# Altium PCB planespotter.PcbDoc
Units mil, origin at the board's own origin, x right, y up, seen from the top; angles counter-clockwise.
Board outline 3149.61 x 2185.04 mil, 4 copper layers (Top Layer, Ground Plane, Power Plane, Bottom Layer), stack 62.192 mil thick; 74 components, 61 nets, 274 pads, 164 vias.
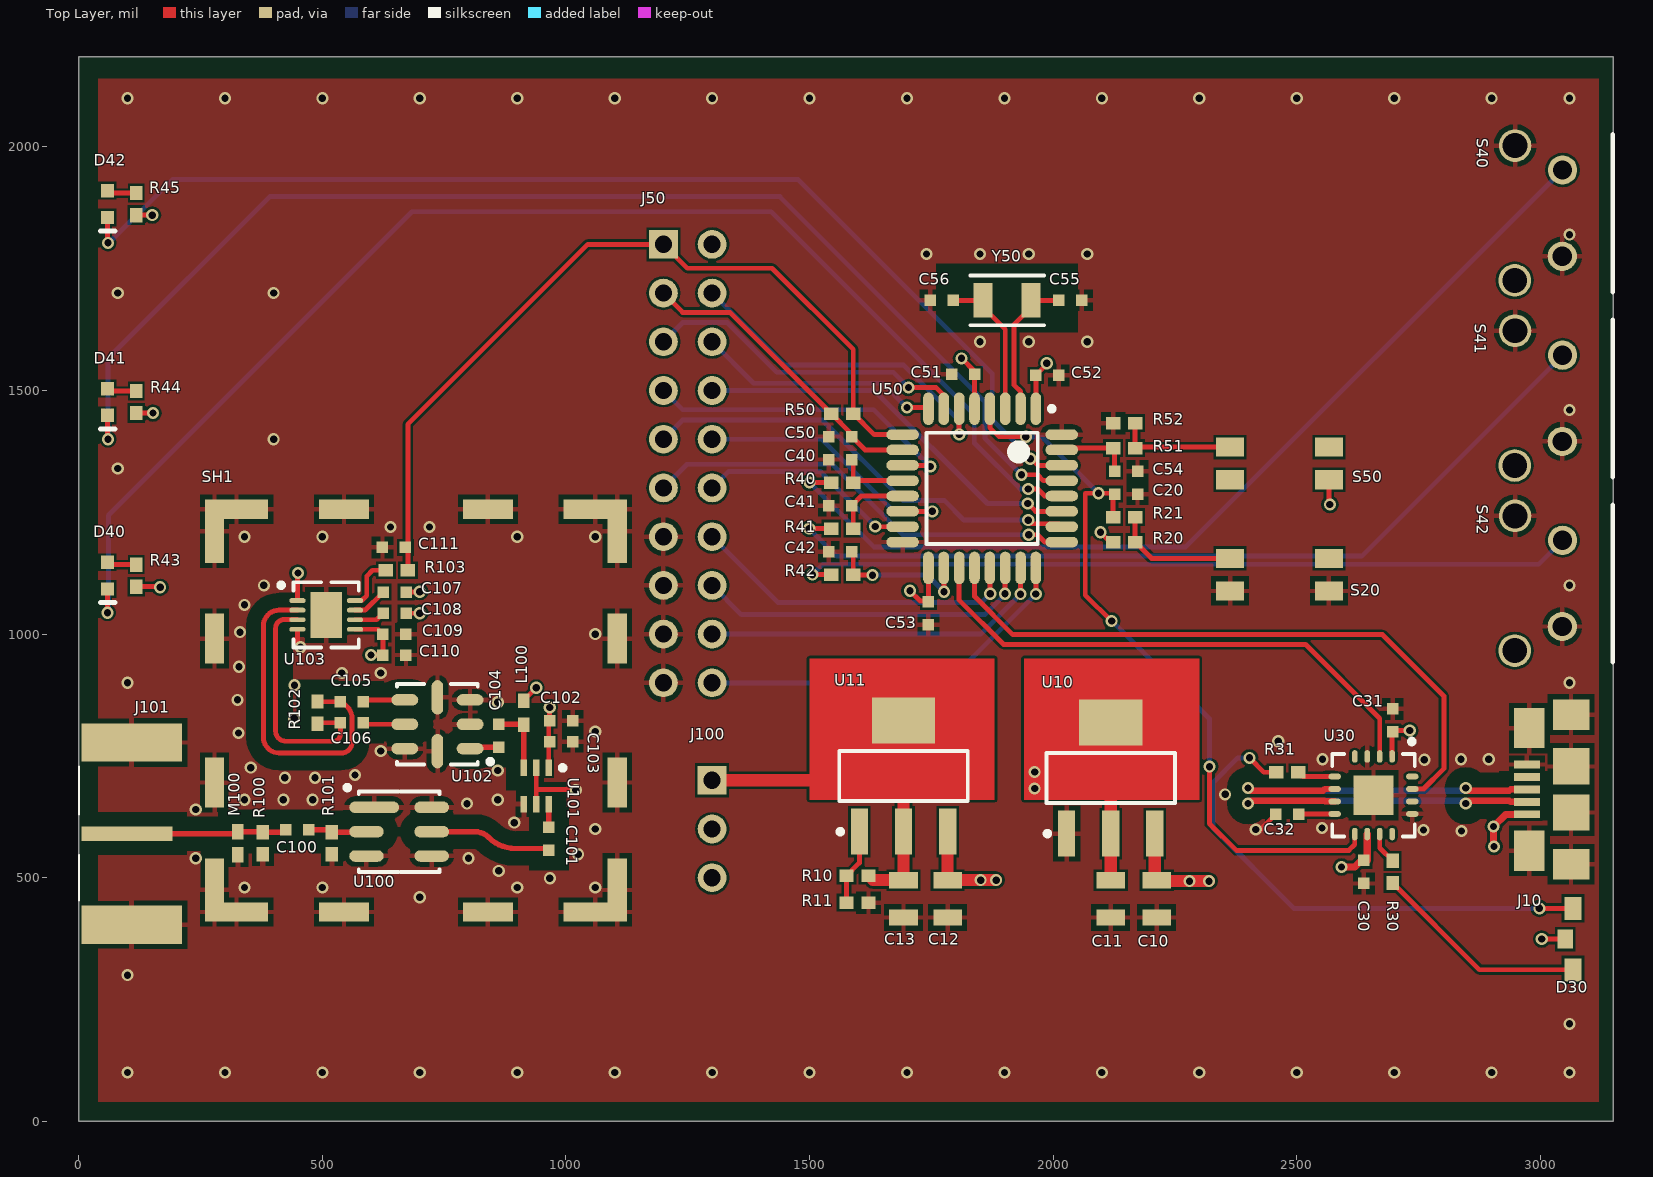
[diagram p0: Top Layer view]
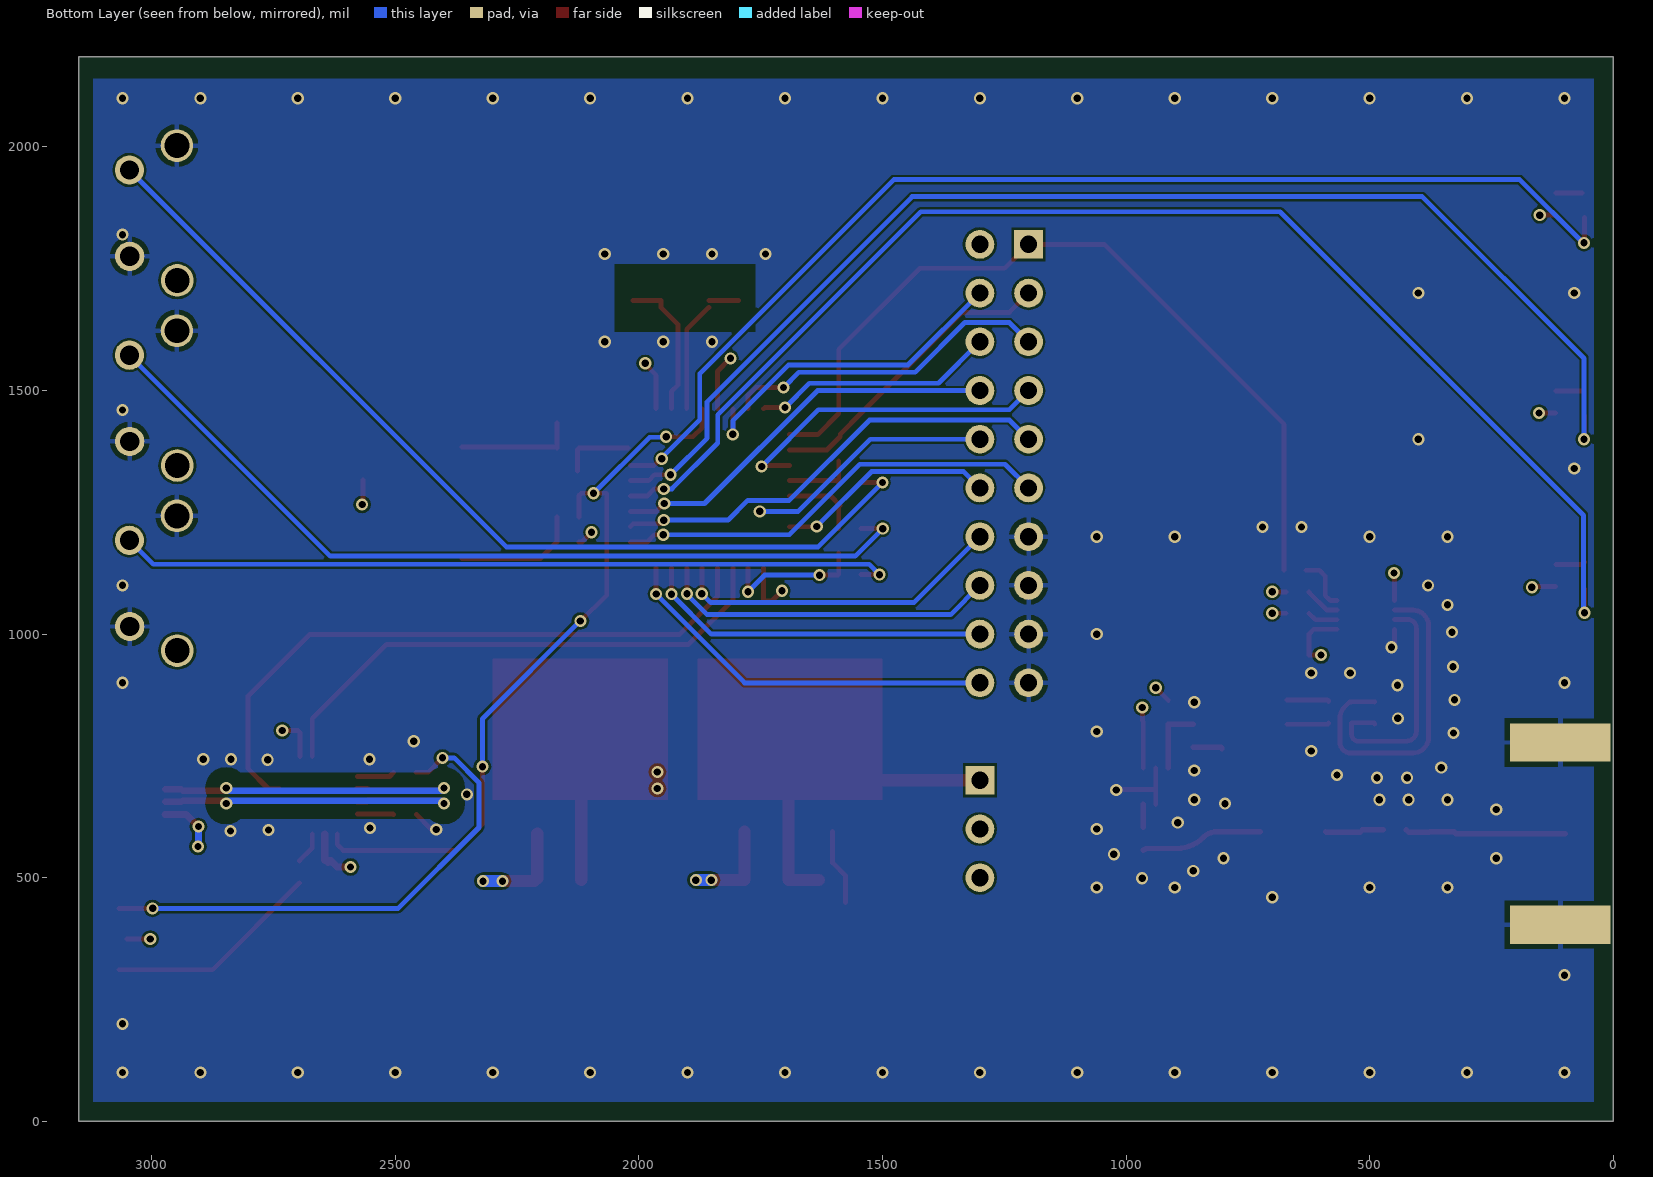
[diagram p1: Bottom Layer view, seen from below]
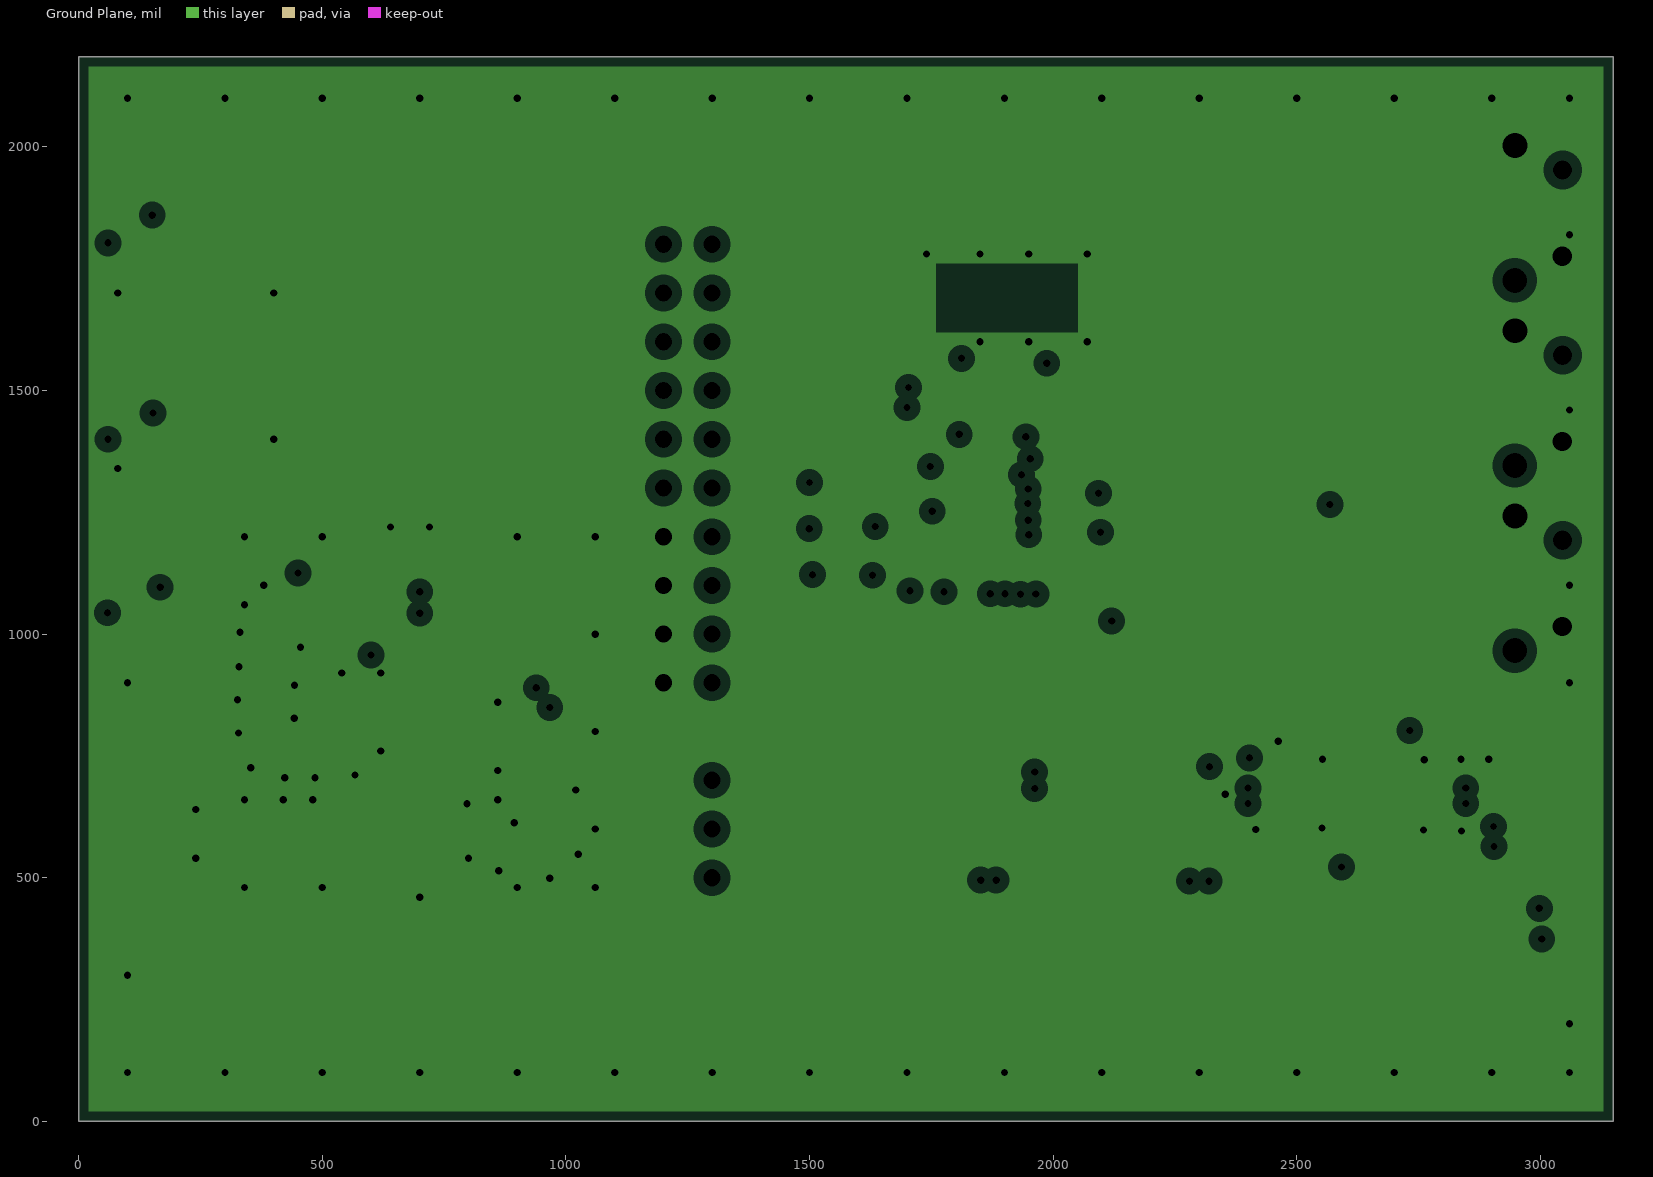
[diagram p2: Ground Plane, clearances drawn from the general rule]
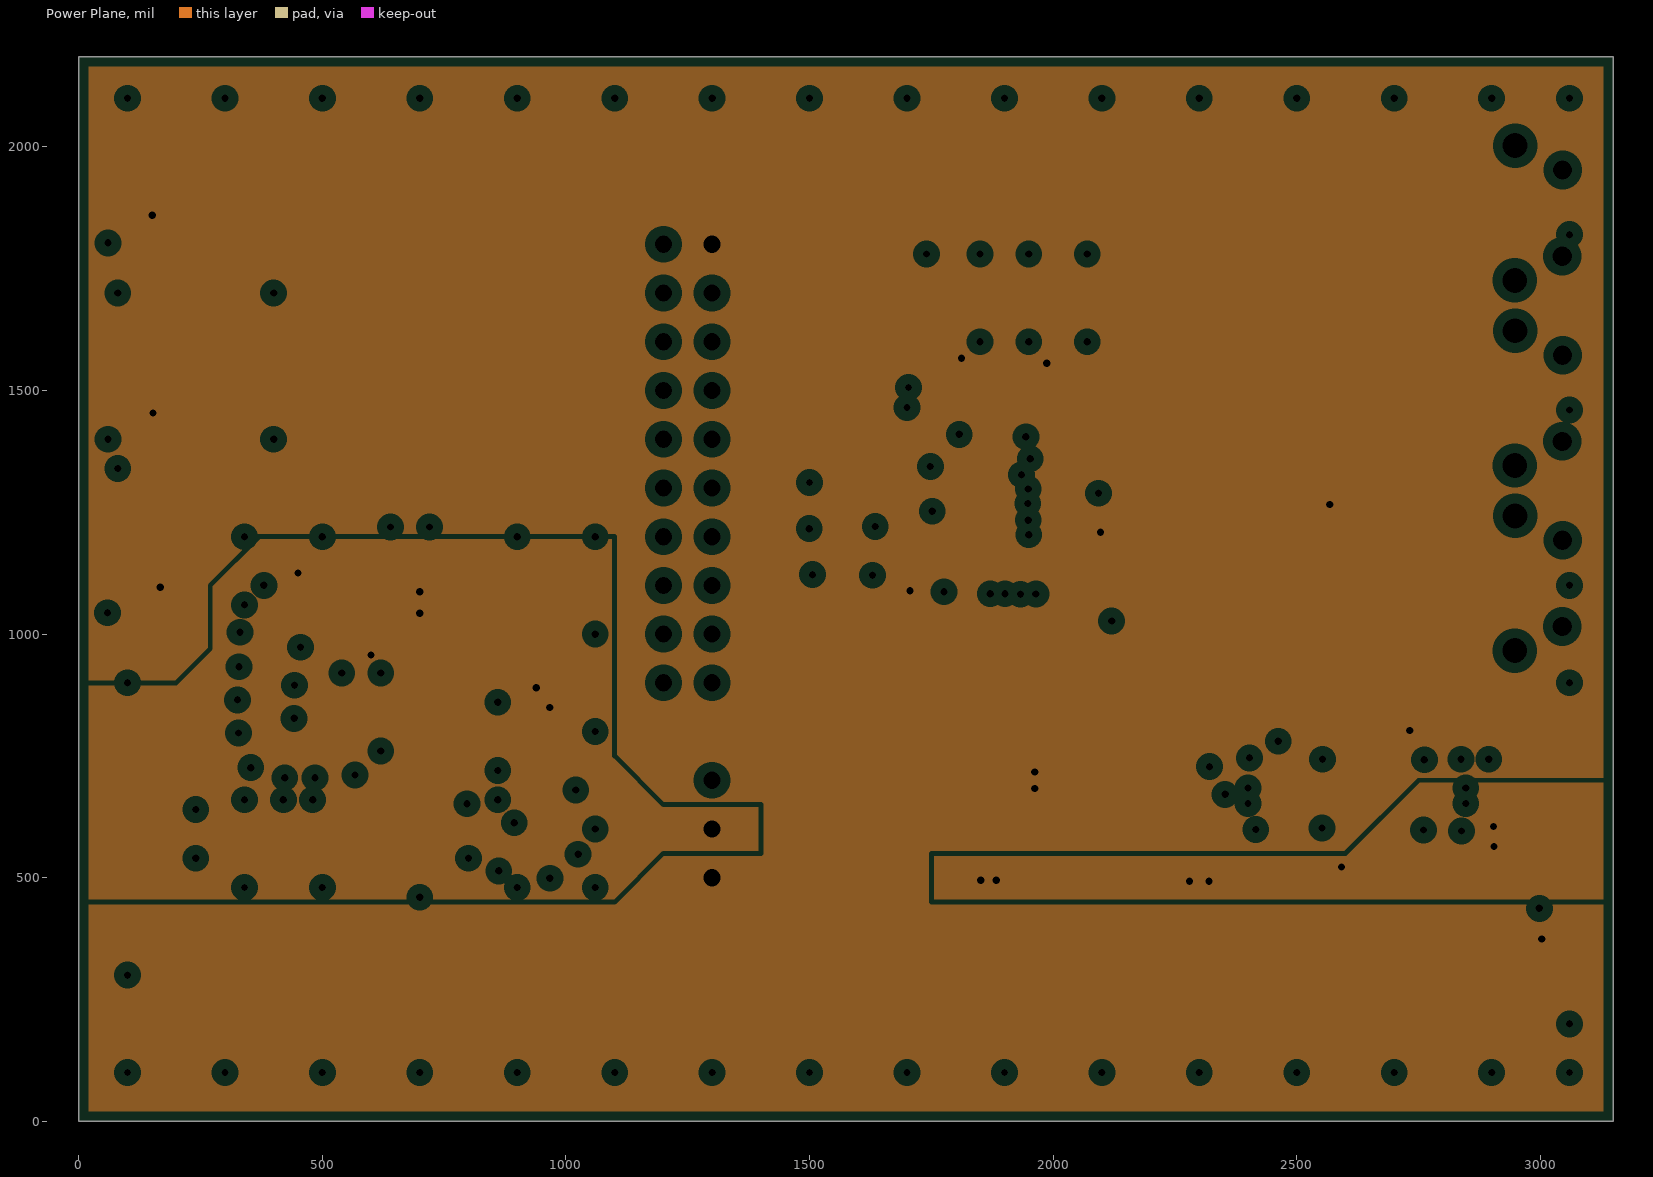
[diagram p3: Power Plane, clearances drawn from the general rule]
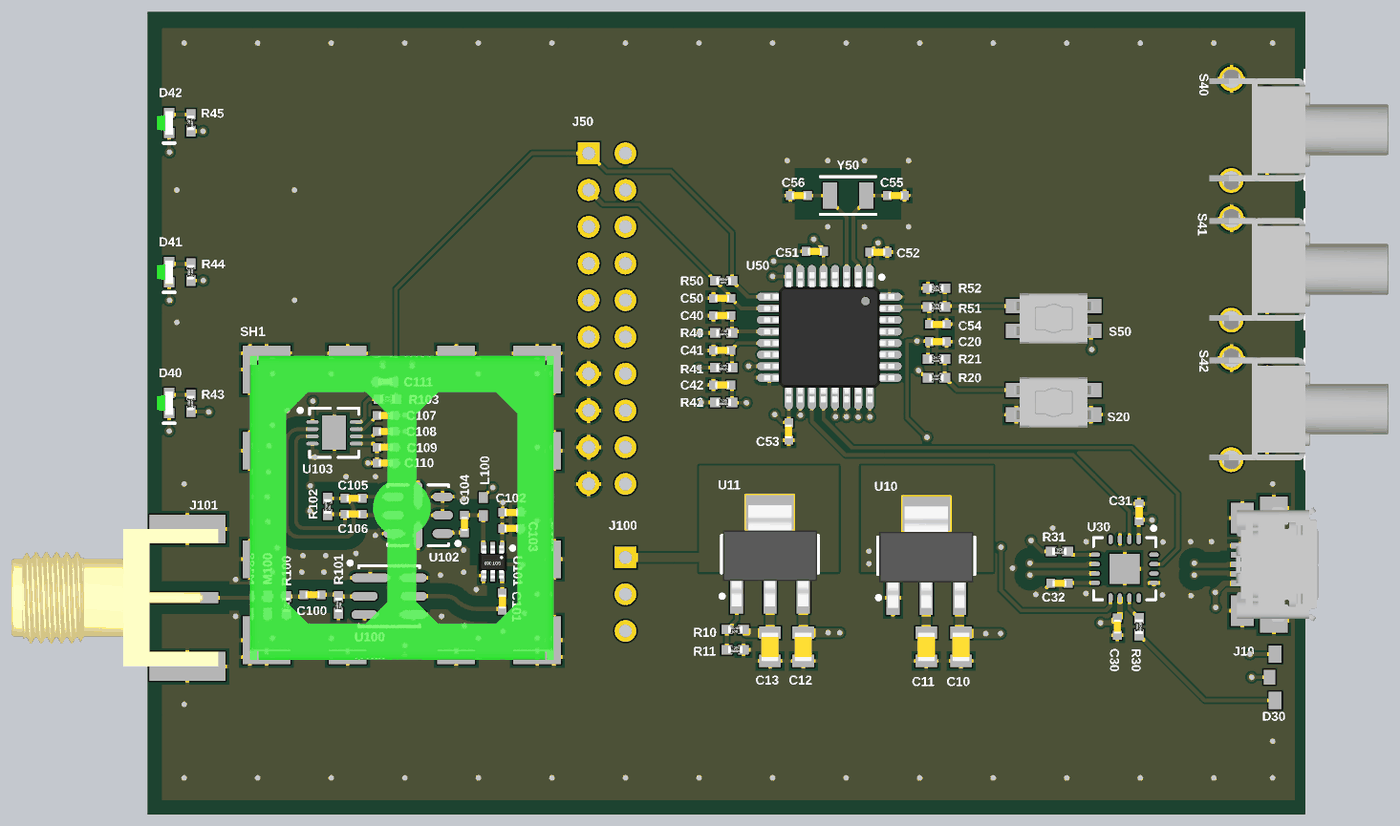
[diagram p4: 3D render of the assembled board from above, using the file's embedded part models]

## Layer stack, top to bottom
Top Solder: solder mask 0.4, Solder Resist, Dk 3.5
Top Layer: signal copper 1.4
Dielectric 1: core 7.874, FR-4, Dk 4.2
Ground Plane: plane copper 1.4, net GND
Dielectric 3: core 40.8441, FR-4, Dk 4.2
Power Plane: plane copper 1.4, net 3V3
Dielectric 4: prepreg 7.874, FR-4, Dk 4.2
Bottom Layer: signal copper 1.4
Bottom Solder: solder mask 0.4, Solder Resist, Dk 3.5

## Board outline
0,0 3149.61,0 3149.61,2185.04 0,2185.04

## Design rules (kind name [scope] priority, off if disabled: settings)
Clearance "50 Ohm Clearance" [InNetClass('50_OHM') vs InNamedPolygon('TopGndPour')] p1: gap=30
Clearance "NPTH Clearance" [All vs IsThruPin and (not PadIsPlated)] p2: gap=10
Clearance "Diff Pair Ground Pour Clearance" [InNamedPolygon('TopGndPour') OR InNamedPolygon('BtmGndPour') vs (InDifferentialPairClass('All Differential Pairs'))] p3: gap=30
Clearance "USB Hub Clearance" [InComponent('U100') OR InComponent('U200') vs InComponent('U100') OR InComponent('U200')] p4: gap=3
Clearance [All] p5: gap=5
ComponentClearance headerClearance [HasFootprint('HDR254P1X6-N-RA-F') vs HasFootprint('HDR254P1X6-N-RA-F')] p1: gap=0 collisioncheckmode=3 verticalgap=0 showdistances=FALSE
ComponentClearance [All] p2: gap=10 collisioncheckmode=3 verticalgap=10 showdistances=FALSE
DiffPairsRouting [All] p1: maxlimit=7 minlimit=7 mostfreqgap=7 toplayer_minwidth=7 toplayer_maxwidth=15 toplayer_prefwidth=15 bottomlayer_minwidth=7 bottomlayer_maxwidth=15 bottomlayer_prefwidth=15 maxuncoupledlength=500
HoleSize [All] p1: absolutevalues=TRUE maxlimit=250 minlimit=1 maxpercent=80.000 minpercent=20.000
MinimumSolderMaskSliver DCDCSolderMaskSliver [InComponent('U200') vs InComponent('U200')] p1: minsoldermaskwidth=1
MinimumSolderMaskSliver "Min Solder Mask Sliver" [All] p2: minsoldermaskwidth=3
PlaneClearance [All] p1: clearance=20
PlaneConnect "Stitching Via Connect" [IsVia] p1: planeconnectstyle=Direct reliefexpansion=20 reliefentries=4 reliefconductorwidth=10 reliefairgap=10
PlaneConnect [All] p2: planeconnectstyle=Relief reliefexpansion=20 reliefentries=4 reliefconductorwidth=10 reliefairgap=10
PolygonConnect PolygonViaConnect [IsVia vs IsPolygon] p1: connectstyle=Direct reliefconductorwidth=10 reliefentries=4 polygonreliefangle="90 Angle" airgapwidth=10
PolygonConnect [All] p2: connectstyle=Relief reliefconductorwidth=10 reliefentries=4 polygonreliefangle="90 Angle" airgapwidth=10
RoutingVias [All] p1: holewidth=15 width=25 viastyle="Through Hole" minholewidth=7 minwidth=20 maxholewidth=35 maxwidth=50
SilkToSilkClearance [All] p1: silktosilkclearance=3
SilkToSolderMaskClearance "Diode Silk to Solder Mask" [InComponent('D600')] p1: minsilkscreentomaskgap=0 clearancetoexposedcopper=TRUE
SilkToSolderMaskClearance [IsPad] p2: minsilkscreentomaskgap=5 clearancetoexposedcopper=TRUE
SolderMaskExpansion [All] p1: expansion=4
Width 50OhmWidth [InNetClass('50_OHM')] p1: maxlimit=11.57 minlimit=10.79 preferedwidth=11.18 impedancedriven=TRUE minimp=49.000000 maximp=51.000000 favimp=50.000000
Width [All] p2: maxlimit=50 minlimit=7 preferedwidth=10
21 further rules are at their usual default settings.

## Classes and differential pairs
net class 50_OHM: DET_IN_N DET_IN_P NetC100_1 NetC100_2 NetC101_1 NetC101_2 NetC104_2 RF_AMP RF_FILT_N RF_FILT_P
differential pair RF_FILT: +RF_FILT_P -RF_FILT_N
differential pair DET_IN: +DET_IN_P -DET_IN_N
differential pair USB: +USB_P -USB_N

## Components (designator, comment, footprint, x,y, rotation, side; value= is the part's Value field where it differs from the comment)
C10 "Ceramic Capacitor" CAPC2012X14N 2212.6,456.69 r90 top
C11 "Ceramic Capacitor" CAPC2012X14N 2118.11,456.69 r90 top
C12 "Ceramic Capacitor" CAPC2012X14N 1783.46,456.69 r90 top
C13 "Ceramic Capacitor" CAPC2012X14N 1692.91,456.69 r90 top
C20 "Ceramic Capacitor" CAPC1005X07N 2149.61,1287.4 r180 top
C30 "Ceramic Capacitor" CAPC1005X07N 2637.8,511.81 r90 top
C31 "Ceramic Capacitor" CAPC1005X07N 2696.85,822.83 r270 top
C32 "Ceramic Capacitor" CAPC1005X07N 2480.32,629.92 r0 top
C40 "Ceramic Capacitor" CAPC1005X07N 1562.99,1358.27 r0 top
C41 "Ceramic Capacitor" CAPC1005X07N 1562.99,1263.78 r0 top
C42 "Ceramic Capacitor" CAPC1005X07N 1562.99,1169.29 r0 top
C50 "Ceramic Capacitor" CAPC1005X07N 1562.99,1405.51 r0 top
C51 "Ceramic Capacitor" CAPC1005X07N 1815,1533 r0 top
C52 "Ceramic Capacitor" CAPC1005X07N 1988,1531 r180 top
C53 "Ceramic Capacitor" CAPC1005X07N 1744,1043 r90 top
C54 "Ceramic Capacitor" CAPC1005X07N 2149.61,1334.65 r180 top
C55 "Ceramic Capacitor" CAPC1005X07N 2035.43,1685.04 r180 top
C56 "Ceramic Capacitor" CAPC1005X07N 1771.65,1685.04 r0 top
C100 "Ceramic Capacitor" CAPC1005X07N 448.82,598.43 r180 top
C101 "Ceramic Capacitor" CAPC1005X07N 965,580 r270 top
C102 "Ceramic Capacitor" CAPC1005X07N 990.19,822.39 r180 top
C103 "Ceramic Capacitor" CAPC1005X07N 990.19,779.09 r180 top
C104 "Ceramic Capacitor" CAPC1005X07N 862.2,791.34 r90 top
C105 "Ceramic Capacitor" CAPC1005X07N 560.5,861.27 r0 top
C106 "Ceramic Capacitor" CAPC1005X07N 560.5,817.96 r0 top
C107 "Ceramic Capacitor" CAPC1005X07N 648.23,1086.24 r0 top
C108 "Ceramic Capacitor" CAPC1005X07N 648.23,1042.94 r180 top
C109 "Ceramic Capacitor" CAPC1005X07N 648,1000 r180 top
C110 "Ceramic Capacitor" CAPC1005X07N 648,957 r180 top
C111 "Ceramic Capacitor" CAPC1005X07N 647,1178 r0 top
D30 "LED Red and Green" XZMDKVG88W 3051.18,374.02 r90 top
D40 "LED Green" LED0603X3N-RA 59.06,1120.08 r90 top
D41 "LED Green" LED0603X3N-RA 59.06,1476.38 r90 top
D42 "LED Green" LED0603X3N-RA 59.06,1882.68 r90 top
J10 "USB Mini/Micro-B" 10118192-0001LF 2972.44,629.92 r270 top
J50 "Header" HDR254P2X10-N 1200,1800 r270 top
J100 "Header" HDR254P1X3-N 1300,700 r270 top
J101 "SMA RCPT" 142-0701-801 99,590.55 r270 top
L100 "Inductor" INDC1005X06N 913.39,838.58 r270 top
M100 "MOV" VAR1005X06N 326.77,570.87 r90 top
R10 "Resistor" RESC1005X04N 1598.43,503.94 r180 top
R11 "Resistor" RESC1005X04N 1598.43,448.82 r0 top
R20 "Resistor" RESC1005X04N 2145.67,1188.98 r0 top
R21 "Resistor" RESC1005X04N 2145.67,1240.16 r180 top
R30 "Resistor" RESC1005X04N 2696.85,511.81 r90 top
R31 "Resistor" RESC1005X04N 2480.32,716.54 r0 top
R40 "Resistor" RESC1005X04N 1566.93,1311.02 r0 top
R41 "Resistor" RESC1005X04N 1566.93,1216.54 r0 top
R42 "Resistor" RESC1005X04N 1566.93,1122.05 r0 top
R43 "Resistor" RESC1005X04N 118.11,1120.08 r90 top
R44 "Resistor" RESC1005X04N 118.11,1476.38 r90 top
R45 "Resistor" RESC1005X04N 118.11,1882.68 r90 top
R50 "Resistor" RESC1005X04N 1566.93,1452.76 r180 top
R51 "Resistor" RESC1005X04N 2145.67,1381.89 r0 top
R52 "Resistor" RESC1005X04N 2145.67,1433.07 r180 top
R100 "Resistor" RESC1005X04N 377.95,570.87 r270 top
R101 "Resistor" RESC1005X04N 519.69,570.87 r270 top
R102 "Resistor" RESC1005X04N 490,839 r270 top
R103 "Resistor" RESC1005X04N 653,1131 r0 top
S20 "Push Button" BTN470X350X210-4N 2464.57,1122.05 r90 top
S40 "Push Button" 1-1825027-1 3180,1860 r90 top
S41 "Push Button" 1-1825027-1 3180,1480 r90 top
S42 "Push Button" 1-1825027-1 3180,1100 r90 top
S50 "Push Button" BTN470X350X210-4N 2464.57,1350.39 r270 top
SH1 "Sheild" SHIELD_21X21X3_FRAME_SMD 692,843 r0 top
U10 "AP1117" SOT230P700X180-4N 2118.11,704.72 r90 top
U11 "AP1117" SOT230P700X180-4N 1692.91,708.66 r90 top
U30 "FT230" QFN65P400X400X80_HS-17N 2657.48,669.29 r270 top
U50 "STM32F0" TQFP80P900X900X160-32N 1854.33,1299.21 r270 top
U100 "TA1090EC" QFN127P380X380X150-6N 657.48,594.49 r0 top
U101 "BGM1013" SOT65P210X80-6N 939,688 r270 top
U102 "TA0232A" QFN127P380X380X125-8N 736.22,814.96 r180 top
U103 "LT5538" QFN50P300X300X80_HS-9N 507.87,1039.37 r0 top
Y50 "XTAL_COMPACT" XTAL_32X15X09-2N 1905.51,1685.04 r180 top

## Footprints (in the part's own frame and the unit in brackets; to place one, negate y for a bottom-side part, rotate by r counter-clockwise, add the part's x,y. Pads: shape width x height; smd on the part's side, far side on the other; paste and mask are expansions set on the pad)
1-1825027-1 [mm] "Button, SPST, Off-Momentary, Normally Open, 24V, 50mA, Round, 7mm"
  round 1.524 hole 1: 1(-2.146,3.43) 2(2.35,3.412)
  round 1.7 hole 1.3: 3(3.624,5.89) 4(-3.403,5.908)
  silkscreen extent -4,0.8 4.2,0.8, body extent -4.1,-4.94 4.3,7.42, height 7.1
142-0701-801 [mm] "SMA RCPT Board Edge"
  rect 0.76x4.75 smd: 1(0,0)
  rect 2x5.25 smd: 2(-4.75,0.25) 2(4.75,0.25)
  rect 2x5.25 smd far side: 2(-4.75,0.25) 2(4.75,0.25)
  silkscreen extent -3.5,-2.5 3.5,-2.5, body extent -4.76,-11.9 4.76,2.37, height 4.35
10118192-0001LF [mm] "Conn, USB, RCPT, Type B, Micro, Surface Mount"
  rect 0.4x1.35 smd mask+0.05: 1(0,0) 2(-0.65,0) 3(-1.3,0) 4(-1.95,0) 5(-2.6,0)
  rect 1.6x1.9 smd: 5(-5.2,2.3) 5(2.6,2.3)
  rect 2.1x1.6 smd: 5(-4.5,0.125) 5(1.9,0.125)
  rect 1.9x1.9 smd: 5(-2.5,2.3) 5(-0.1,2.3)
  body extent -5.26,-0.29 2.66,5.37, height 2.75
BTN470X350X210-4N [mm] "Push Button 4-Terminal"
  rect 1x1.45 smd: 1(-0.85,2.575) 2(-0.85,-2.575) 3(0.85,-2.575) 4(0.85,2.575)
  body extent -1.75,-2.75 1.75,2.75, height 2.5
CAPC1005X07N [mm] "Chip Capacitor, 2-Leads, Body 1.0x0.5mm, IPC Medium Density"
  rect 0.6x0.6 smd: 1(-0.6,0) 2(0.6,0)
  body extent -0.5,-0.25 0.5,0.25, height 0.6
CAPC2012X14N [mm] "Chip Capacitor, 2-Leads, Body 2.0x1.3mm, IPC Medium Density"
  rect 0.85x1.5 smd: 1(-0.975,0) 2(0.975,0)
  body extent -1,-0.6 1,0.6, height 1.4
HDR254P1X3-N [mm] "HDR, 2.54mm Pitch, 3-Pin"
  rect 1.5x1.5 hole 0.9: 1(0,0)
  round 1.5 hole 0.9: 2(2.54,0) 3(5.08,0)
  body extent -1.27,-1.27 6.35,1.27, height 8.54
HDR254P2X10-N [mm] "HDR, 2.54mm Pitch, 2x10-Pin"
  rect 1.5x1.5 hole 0.9: 1(0,0)
  round 1.5 hole 0.9: 2(0,2.54) 3(2.54,0) 4(2.54,2.54) 5(5.08,0) 6(5.08,2.54) 7(7.62,0) 8(7.62,2.54) 9(10.16,0) 10(10.16,2.54) 11(12.7,0) 12(12.7,2.54) 13(15.24,0) 14(15.24,2.54) 15(17.78,0) 16(17.78,2.54) 17(20.32,0) 18(20.32,2.54) 19(22.86,0) 20(22.86,2.54)
  body extent -1.27,-1.27 24.13,3.81, height 8.54
INDC1005X06N [mm] "Chip Inductor, 2-Leads, Body 1.0x0.5mm, IPC Medium Density"
  rect 0.75x0.6 smd: 1(-0.625,0) 2(0.625,0)
  body extent -0.53,-0.28 0.53,0.27, height 0.55
LED0603X3N-RA [mm] "LED, 0603 Side-View, Green"
  rect 0.7x0.7 smd: A(0.7,0) K(-0.7,0)
  silkscreen extent -1.4,-0.38 -1.4,0.38, body extent -0.81,-0.25 0.81,0.85, height 0.8
QFN50P300X300X80_HS-9N [mm] "QFN, 8-Leads, Body 3.00x3.00mm, Pitch 0.50mm, Thermal Pad 1.65x2.38mm, IPC Medium Density"
  oval 0.85x0.25 smd mask+0.05: 1(-1.5,0.75) 2(-1.5,0.25) 3(-1.5,-0.25) 4(-1.5,-0.75) 5(1.5,-0.75) 6(1.5,-0.25) 7(1.5,0.25) 8(1.5,0.75)
  rect 1.65x2.38 smd mask+0.05: 9(0,0)
  silkscreen extent -2.47,-1.7 1.7,1.7, body extent -1.55,-1.55 1.55,1.55, height 0.8
QFN65P400X400X80_HS-17N [mm] "QFN, 16-Leads, Body 4.00x4.00mm, Pitch 0.65mm, Thermal Pad 2.08x2.08mm, IPC Medium Density"
  oval 0.65x0.3 smd: 1(-2.025,0.975) 2(-2.025,0.325) 3(-2.025,-0.325) 4(-2.025,-0.975) 9(2.025,-0.975) 10(2.025,-0.325) 11(2.025,0.325) 12(2.025,0.975)
  oval 0.3x0.65 smd: 5(-0.975,-2.025) 6(-0.325,-2.025) 7(0.325,-2.025) 8(0.975,-2.025) 13(0.975,2.025) 14(0.325,2.025) 15(-0.325,2.025) 16(-0.975,2.025)
  rect 2.08x2.08 smd: 17(0,0)
  silkscreen extent -2.92,-2.15 2.15,2.15, body extent -2,-2 2,2, height 0.8
QFN127P380X380X125-8N [mm] "QFN, 8-Leads, Body 3.80x3.80mm, Pitch 1.27mm, IPC Medium Density"
  oval 1.4x0.6 smd: 1(-1.7,1.27) 2(-1.7,0) 3(-1.7,-1.27) 5(1.7,-1.27) 6(1.7,0) 7(1.7,1.27)
  oval 0.6x1.8 smd: 4(0,-1.4) 8(0,1.4)
  silkscreen extent -2.88,-2.1 2.1,2.1, body extent -1.95,-1.95 1.95,1.95, height 1.25
QFN127P380X380X150-6N [mm] "QFN, 6-Leads, Body 3.80x3.80mm, Pitch 1.27mm, IPC Medium Density"
  oval 2.6x0.6 smd: 1(-1.3,1.27)
  oval 1.8x0.6 smd: 2(-1.7,0) 3(-1.7,-1.27) 4(1.7,-1.27) 5(1.7,0) 6(1.7,1.27)
  silkscreen extent -2.82,-2.1 2.1,2.42, body extent -1.95,-1.95 1.95,1.95, height 1.5
RESC1005X04N [mm] "Chip Resistor, 2-Leads, Body 1.0x0.5mm, IPC Medium Density"
  rect 0.75x0.65 smd: 1(-0.575,0) 2(0.575,0)
  body extent -0.5,-0.25 0.5,0.25, height 0.35
SHIELD_21X21X3_FRAME_SMD [mm] "BRF Shield, Frame, 20mm x 20mm x 3mm, SMD"
  rect 1x3.3 smd: 1(-10.5,-9.35) 1(-10.5,9.35) 1(10.5,-9.35) 1(10.5,9.35)
  rect 1x2.6 smd: 1(-10.5,-3.75) 1(-10.5,3.75) 1(10.5,-3.75) 1(10.5,3.75)
  rect 3.3x1 smd: 1(-9.35,-10.5) 1(-9.35,10.5) 1(9.35,-10.5) 1(9.35,10.5)
  rect 2.6x1 smd: 1(-3.75,-10.5) 1(-3.75,10.5) 1(3.75,-10.5) 1(3.75,10.5)
  body extent -10.5,-10.7 10.5,10.3, height 3.5
SOT65P210X80-6N [mm] "SOT23, 6-Leads, Body 2.00x2.10mm, Pitch 0.65mm, IPC Medium Density"
  rect 0.85x0.35 smd: 1(-0.95,0.65) 2(-0.95,0) 3(-0.95,-0.65) 4(0.95,-0.65) 5(0.95,0) 6(0.95,0.65)
  silkscreen extent -1.07,1.25 -0.83,1.5, body extent -1.13,-1 1.13,1, height 1
SOT230P700X180-4N [mm] "SOT223, 4-Leads, Body 6.7x7.3mm (max), Pitch 2.30mm, IPC Medium Density"
  rect 2.4x0.9 smd: 1(-2.9,2.3) 2(-2.9,0) 3(-2.9,-2.3)
  rect 2.4x3.3 smd: 4(2.9,0)
  silkscreen extent -3.02,-3.35 1.3,3.42, body extent -3.6,-3.25 3.4,3.25, height 1.64
TQFP80P900X900X160-32N [mm] "TQFP, 32-Leads, Body 7.00x7.00mm, Pitch 0.80mm, IPC Medium Density"
  oval 1.7x0.55 smd mask+0.05: 1(-4.15,2.8) 2(-4.15,2) 3(-4.15,1.2) 4(-4.15,0.4) 5(-4.15,-0.4) 6(-4.15,-1.2) 7(-4.15,-2) 8(-4.15,-2.8) 17(4.15,-2.8) 18(4.15,-2) 19(4.15,-1.2) 20(4.15,-0.4) 21(4.15,0.4) 22(4.15,1.2) 23(4.15,2) 24(4.15,2.8)
  oval 0.55x1.7 smd mask+0.05: 9(-2.8,-4.15) 10(-2,-4.15) 11(-1.2,-4.15) 12(-0.4,-4.15) 13(0.4,-4.15) 14(1.2,-4.15) 15(2,-4.15) 16(2.8,-4.15) 25(2.8,4.15) 26(2,4.15) 27(1.2,4.15) 28(0.4,4.15) 29(-0.4,4.15) 30(-1.2,4.15) 31(-2,4.15) 32(-2.8,4.15)
  silkscreen extent -4.27,-2.9 2.9,3.75, body extent -4.5,-4.5 4.5,4.5, height 1.5
VAR1005X06N [mm] "Chip Varistor 2-Leads, Body 1.0x0.5mm, IPC Medium Density"
  rect 0.8x0.6 smd: 1(-0.6,0) 2(0.6,0)
  body extent -0.52,-0.28 0.53,0.27, height 0.55
XTAL_32X15X09-2N [mm] "TUNING FORK CRYSTAL, 2PIN"
  rect 1x1.8 smd: 1(-1.25,0) 2(1.25,0)
  silkscreen extent -1.92,-1.3 1.92,1.3, body extent -1.75,-0.9 1.75,0.9, height 0.9
XZMDKVG88W [mm] "Red/Green sideview LED"
  rect 1x0.8 smd: A(0,0)
  rect 1.2x0.9 smd: KG(1.6,-0.4) KR(-1.6,-0.4)
  body extent -1.6,-1.9 1.6,-0.4, height 1

## Part data
C10 C11 C12 C13: library part CAPC00037, "CAP,X5R,10uF,10%,16V,0805,#"
C20 C40 C41 C42 C51 C52 C53 C54: library part CAPC00005, "CAP,X5R,1.0uF,10%,6.3V, 0402,#"
C30 C31 C102 C107 C108 C110 C111: library part CAPC00002, "CAP,X5R,0.1uF,10%,6.3V, 0402,#"
C32: library part CAPC00048, "CAP,C0G,330pF,5%,50V,0402"
C50: library part CAPC00097, "CAP,X5R,4.7uF,20%,6.3V, 0402"
C55 C56: library part CAPC00100, "CAP,C0G,2pF,±0.25pF,50V,0402"
C100 C101 C104: library part CAP00012, "CAP,39pF,50V,5%,NP0,0402"
C103 C109: library part CAPC00043, "CAP,C0G,100pF,5%,50V,0402"
C105 C106: library part CAPC00008, "CAP,C0G,10pF,+/-0.25pF,50V, 0402"
D30: library part LED00009, "LED, Red and Green, Side-view, Common Anode, 1.95/2.1V, 630/570nm, 120/40mcd, SMT"
D40 D41 D42: library part LED00051, "LED, Green, 2.1V, 569nm, 10mcd, 0603 Side-View"
J10: library part USB00005, "Conn, USB, RCPT, Type B, Micro, Surface Mount"
J50: library part HDR00050, "HDR, 2x10 Pin, 2.54mm Pitch, TH"
J100: library part HDR00003, "HDR, 1x3 Pin, 2.54mm Pitch, Gold Flash, Vertical, TH"
J101: library part CON00037, "CONN SMA JACK 50 OHM EDGE MNT"
L100: library part IND00001, "Chip Inductor, 68 nH, 180 mA, 1.2O, 0402"
M100: library part TVS00006, "Varistor,10V,10A,0402"
R10: library part RES00050, "RES,18K,5%,0.063W,0402"
R11: library part RES00020, "RES,10K,1%,0.063W,0402,#"
R20 R52: library part RES00001, "RES,100K,5%,0.063W,0402,#"
R21 R40 R41 R42 R51: library part RES00024, "RES,100 Ohm,1%,0.063W,0402,#"
R30 R31 R43 R44 R45: library part RES00011, "RES,220 Ohm,5%,0.063W,0402"
R50: library part RES00008, "RES,47K,5%,0.063W,0402"
R100 R101 R103: library part RES00019, "RES,0 Ohm,0.063W,0402"
R102: library part RES00104, "RES,49.9 Ohm,1%,0.063W,0402"
S20 S50: library part BTN00002, "SPST- NO Momentary Button, 160g Force"
S40 S41 S42: library part BTN00002, "Button, SPST, Off-Momentary, Normally Open, 24V, 50mA, Round, 7mm"
SH1: library part SHD00001, "RF Shield, Frame, 20mm x 20mm x 3mm, SMD"
U10: library part IC00159, "IC, LDO, Fixed 3.3V, 1A, 6VIN Max, Ceramic Stable, SOT-223"
U11: library part IC00191, "IC, LDO, Adjustable 2.6V-15V Out, 1.25V-15V In, 1A Max, Ceramic Stable, SOT-223"
U30: library part IC00004, "USB Serial Translator, Basic, 16QFN"
U50: library part IC00001, "MCU, ARM M0, 32K Flash, 32LQFP"
U100: library part FILT00002, "Filter, SAW, 1090 MHz, 30 MHz BW"
U101: library part IC00003, "RF Amplifier, 0-2.2GHz, 35.5dB, 6-TSSOP"
U102: library part FILT00001, "Filter, SAW, 1090 MHz, 30 MHz BW"
U103: library part IC00003, "RF Log Power Detector, 40 MHz-3.8GHz, -75dBm - 10dBm, 3-5.25V, 8WFDFN"
Y50: library part XTAL00004, "XTAL, 32.768kHz, 20ppm, 6pF, 60K Ohm, 3215"

## Via types
v1: diameter 25, hole 15, Top Layer to Bottom Layer, tented both sides, 164 vias

## Nets (pads, with @x,y where several pads share a name; then routed paths per layer and width w, separated by ;. In a path a pad name is that pad's centre, name@x,y a point inside that pad or via, vN(x,y) a via of type N, cw(c..) or ccw(c..) an arc to the next point about the centre after c; other vN are vias at no path point)
3V3: C11.2 C31.2 C51.2 C52.2 C53.2 D30.A J50.2 J100.3 R20.1 R43.1 R44.1 R45.1 S50.4 U10.2 U10.4 U30.1 U50.1 U50.5 U50.17 | length 993.7
  Top Layer w10: R43.1 165.56,1097.44 v1(167,1096) ; R44.1 v1(152.26,1453.74) ; R45.1 v1(150.96,1860.04) ; v1(1706,1089) 1727,1068 C53.2@1741.62,1068 ; C53.2@1744.09,1066.62 U50.17 ; v1(1812,1566) 1838.62,1539.38 C51.2 ; U50.5 C51.2@1838.58,1533.42 ; C52.2 1987,1553.62 v1(1987,1556) ; U50.1 C52.2@1964.57,1530.81 ; v1(2097,1209) 2117.02,1188.98 R20.1 ; S50.4 2565.94,1266 v1(2568,1266) ; U30.1 2695.87,798.23 C31.2 2699.64,802 v1(2732,802) ; v1(3003,374) D30.A
  Top Layer w25: C11.2 U10.2 U10.4
  other v1: 1962,683 1962,717
4V0: C13.2 J100.1 R10.1 U11.2 U11.4 | length 650.7
  Top Layer w25: J100.1 1560,700 ; R10.1@1629.92,495.08 C13.2 U11.2 U11.4
5V0: C10.2 C12.2 C30.2 J10.1 U10.3 U11.3 U30.10 | length 750.2
  Top Layer w15: v1(2592,522) 2619,522 2632.43,535.43 C30.2 ; C30.2@2637.8,532 C30.2 ; U30.10 2644.68,535.43 C30.2 ; v1@2904,565 v1(2904,605) 2928.92,629.92 J10.1
  Top Layer w25: U11.3 C12.2 v1(1851.08,495.08) ; v1@1852.92,495.08 v1(1882.92,495.08) ; U10.3 2208.66,499.02 C10.2 2214.68,493 v1(2280,493) v1(2320,493)
  Bottom Layer w15: v1(2904,605) 2904,565 v1(2905,564)
  Bottom Layer w25: v1(1851.08,495.08) v1(1882.92,495.08) ; v1(2280,493) v1(2320,493)
BTN1: C40.2 R40.2 U50.12 | length 147.3
  Top Layer w10: C40.2@1589.57,1355.32 R40.2 1593.5,1314.96 U50.12
BTN2: C41.2 R41.2 U50.13 | length 156.8
  Top Layer w10: C41.2 1606.3,1283.46 U50.13 ; R41.2 C41.2@1589.57,1260.83
BTN3: C42.2 R42.2 U50.18 | length 292.8
  Top Layer w10: R42.2 C42.2@1589.57,1166.34 ; R42.2@1590.61,1121 v1(1629,1121) ; U50.18 1776,1135.42 v1(1776,1087)
  Bottom Layer w10: v1(1629,1121) 1742,1121 v1(1776,1087)
DET_IN_N: C106.1 R102.2 U103.3 | length 492.4
  Top Layer w10: U103.3 448.82,1030 422,1030 ccw(c422,1012) 404,1012 404,801 ccw(c425,801) 425,780 523,780 ccw(c523,793.87) 536.87,793.87 C106.1 492.58,817.96 ccw(c492.58,815.01) R102.2@489.63,815.01
DET_IN_P: C105.1 R102.1 U103.2 | length 671.6
  Top Layer w10: U103.2 411.21,1049.21 ccw(c411.21,1017) 379,1017 379,788 ccw(c411,788) 411,756 539,756 ccw(c539,778) 561,778 561,826.86 ccw(c526.86,826.86) 551,851 543.92,858.08 ccw(c536.87,851.04) 536.87,861 C105.1 490.61,861.27 ccw(c490.61,860.28) R102.1@489.63,860.28
DETECTOR_OUT: C111.2 J50.1 R50.1 R103.2 U50.9 | length 1706.8
  Top Layer w10: R103.2 675.64,1430.64 1045,1800 J50.1 1249,1751 1423,1751 1589.57,1584.43 R50.1 1632.87,1409.45 U50.9
FILT_OUT: C50.2 J50.3 R50.2 U50.10 | length 627.2
  Top Layer w10: J50.3 1239.53,1660.47 1336.58,1660.47 R50.2 1586.61,1410.43 C50.2 1614.17,1377.95 U50.10
GND: C10.1 C11.1 C12.1 C13.1 C20.1 C30.1 C31.1 C32.1 C40.1 C41.1 C42.1 C50.1 C51.1 C52.1 C53.1 C54.1 C55.1 C56.1 C102.1 C103.1 C109.1 C110.1 C111.1 J10.5 J50.13 J50.15 J50.17 J50.19 J101.2 M100.1 R11.2 R52.2 R100.2 R101.2 S20.1 S20.2 S40.1 S40.3 S41.1 S41.3 S42.1 S42.3 SH1.1 U10.1 U30.3 U30.13 U30.17 U50.16 U50.32 U100.1 U100.3 U100.4 U100.6 U101.2 U101.4 U101.5 U102.2 U102.3 U102.4 U102.7 U102.8 U103.4 U103.9 | length 248.8
  Top Layer w10: U103.4 448.82,987.92 ccw(c469.92,987.92) v1(455,973) ; U101.5 939,681 ; U101.2 939,681 ; v1(1020,680) 1020,681 939,681 ; v1(2416,599) 2425.77,599 C32.1
  other v1: 100,100 300,100 500,100 700,100 900,100 1100,100 1300,100 1500,100 1700,100 1900,100 2100,100 2300,100 2500,100 2700,100 2900,100 3060,100 3060,200 100,300 700,460 340,480 500,480 900,480 1060,480 967,499 862,514 240,540 800,540 1025,548 2838,596 2760,598 1060,600 2552,602 894,613 240,640 797,652 340,660 420,660 480,660 860,660 2353,671 423,705 485,705 567,711 860,720 353,726 2762,742 2553,743 2837,743 2894,743 620,760 2462,780 328,797 1060,800 442,827 860,860 326,865 443,895 100,900 3060,900 540,920 620,920 329,933 1060,1000 331,1004 340,1060 380,1100 3060,1100 340,1200 500,1200 900,1200 1060,1200 640,1220 720,1220 80,1340 400,1400 3060,1460 1850,1600 1950,1600 2070,1600 80,1700 400,1700 1740,1780 1850,1780 1950,1780 2070,1780 3060,1820 100,2100 300,2100 500,2100 700,2100 900,2100 1100,2100 1300,2100 1500,2100 1700,2100 1900,2100 2100,2100 2300,2100 2500,2100 2700,2100 2900,2100 3060,2100
LED1: D40.K U50.28 | length 2739.7
  Top Layer w10: v1(59.06,1044) D40.K ; v1(1949,1298) 1968,1298 1982.54,1283.46 U50.28
  Bottom Layer w10: v1(59.06,1044) 61,1045.94 61,1244 684,1867 1421,1867 1838,1450 1838,1392.18 1932.18,1298 v1(1949,1298)
LED2: D41.K U50.29 | length 2595.9
  Top Layer w10: D41.K 59.06,1400.94 v1(60,1400) ; v1(1935,1327) 1968,1327 1980.04,1314.96 U50.29
  Bottom Layer w10: v1(60,1400) 60,1566 392,1898 1439,1898 1860,1477 1860,1402 v1(1935,1327)
LED3: D42.K U50.30 | length 2362.4
  Top Layer w10: v1@59.06,1803.94 D42.K ; v1(1953,1360) 1955,1360 1968.54,1346.46 U50.30
  Bottom Layer w10: v1(60,1803) 62.1,1803 192.1,1933 1476.82,1933 1875,1534.82 1875,1440 1953,1362 v1(1953,1360)
MCU_BOOT0: C54.2 R51.1 U50.31 | length 145.7
  Top Layer w10: U50.31@2021.65,1381.89 R51.1 ; C54.2 R51.1@2125.98,1378.94
MCU_RX: U30.15 U50.20 | length 1337.7
  Top Layer w10: U50.20 1838.58,1077.42 1917,999 2676,999 2802,873 2802,724 2760.09,682.09 U30.15
MCU_TX: U30.2 U50.19 | length 1107.5
  Top Layer w10: U50.19 1807.09,1069.91 1898,979 2518,979 2670.28,826.72 U30.2
NetC32_2: C32.2 U30.8 | length 74.2
  Top Layer w10: C32.2 2504.92,630.91 U30.8
NetC55_2: C55.2 U50.2 Y50.1 | length 299.3
  Top Layer w10: U50.2 1933.07,1497.93 1920,1511 1920,1636 1954.72,1670.72 Y50.1 C55.2
NetC56_2: C56.2 U50.3 Y50.2 | length 287.9
  Top Layer w10: C56.2 Y50.2 ; Y50.2@1856.3,1670.7 1901.57,1625.43 U50.3
NetC100_1: C100.1 R101.1 U100.2 | length 120.6
  Top Layer w11.18: C100.1 514.76,598.43 R101.1 589.57,593.5 U100.2
NetC100_2: C100.2 J101.1 M100.2 R100.1 | length 330.8
  Top Layer w11.18: J101.1@98.43,590.55 322.83,590.55 M100.2 376.97,594.49 R100.1 420.28,593.5 C100.2
NetC101_1: C101.1 U101.6 | length 47.5
  Top Layer w11.18: C101.1 cw(c965.99,604.61) 964.59,604.61 U101.6 U101.6@965,650.6
NetC101_2: C101.2 U100.5 | length 250.8
  Top Layer w11.18: U100.5 813.27,594.49 cw(c813.27,555.27) 841,583 ccw(c896.53,638.53) 896.53,560 956.26,560 cw(c956.26,547.63) C101.2
NetC104_2: C104.2 L100.2 U101.3 | length 139.8
  Top Layer w10.79: C104.2 L100.2@913.41,814.96 ; U101.3 L100.2
NetC107_1: C107.1 U103.7 | length 73
  Top Layer w10: U103.7 587.57,1049.21 C107.1
NetC108_2: C108.2 U103.6 | length 63.2
  Top Layer w10: U103.6 611.2,1029.53 C108.2
NetD30_KG: D30.KG R31.1 | length 1062.7
  Top Layer w10: v1(2403,746) 2432.46,716.54 R31.1 ; v1(2998,437) D30.KG
  Bottom Layer w10: v1(2403,746) 2379,746 2328,695 2328,603 2494,437 v1(2998,437)
NetD30_KR: D30.KR R30.1 | length 443.9
  Top Layer w10: R30.1 2875,311.02 D30.KR
NetD40_A: D40.A R43.2 | length 61.1
  Top Layer w10: D40.A 63.98,1142.72 R43.2
NetD41_A: D41.A R44.2 | length 54.1
  Top Layer w10: D41.A@63.98,1499.02 R44.2
NetD42_A: D42.A R45.2 | length 54.1
  Top Layer w10: D42.A@63.98,1905.32 R45.2
NetR10_2: R10.2 R11.1 U11.1 | length 156.7
  Top Layer w10: R11.1 R10.2 1602.36,530.51 U11.1
NetR20_2: R20.2 R21.1 S20.4 | length 259.9
  Top Layer w10: R21.1 R20.2 2201.77,1155.51 S20.4
NetR40_1: R40.1 S40.2 | length 1965
  Top Layer w10: v1(1500.02,1311.02) R40.1
  Bottom Layer w10: v1(1500.02,1311.02) 1632.05,1179 2272.16,1179 S40.2
NetR41_1: R41.1 S41.2 | length 1785.2
  Top Layer w10: v1(1499.54,1216.54) R41.1
  Bottom Layer w10: v1(1499.54,1216.54) 1556.07,1160 2633.16,1160 S41.2
NetR42_1: R42.1 S42.2 | length 1607.1
  Top Layer w10: v1(1506.05,1122.05) R42.1
  Bottom Layer w10: v1(1506.05,1122.05) 1527.5,1143.5 2996.66,1143.5 S42.2
NetR51_2: R51.2 R52.1 S50.2 | length 244.1
  Top Layer w10: R51.2 R52.1 ; R51.2@2170.28,1383.86 S50.2
NetR103_1: R103.1 U103.8 | length 112.6
  Top Layer w10: U103.8 580.9,1068.9 591,1079 591,1119 603,1131 R103.1
PA0: J50.4 U50.6 | length 696.3
  Top Layer w10: v1(1807.09,1409.91) U50.6
  Bottom Layer w10: J50.4 1447.5,1552.5 1692.5,1552.5 1807.09,1437.91 v1(1807.09,1409.91)
PA1: J50.5 U50.7 | length 681.6
  Top Layer w10: v1(1703,1506) 1735.4,1506 1735.47,1506.06 1752.72,1506.06 1752.78,1506 1760,1506 1775.59,1490.41 U50.7
  Bottom Layer w10: J50.5 1239.53,1639.53 1331,1639.53 1433.03,1537.5 1671.5,1537.5 v1(1703,1506)
PA2: J50.6 U50.8 | length 501
  Top Layer w10: v1(1700,1465) 1741.69,1465 U50.8
  Bottom Layer w10: J50.6 1385,1515 1650,1515 v1(1700,1465)
PA5: J50.7 U50.11 | length 670.7
  Top Layer w10: U50.11 1745.54,1346.46 v1(1748,1344)
  Bottom Layer w10: J50.7 1239.53,1460.47 1631.53,1460.47 v1(1748,1344)
PA11: J50.14 U50.21 | length 688
  Top Layer w10: U50.21 1870.08,1083.92 v1(1871,1083)
  Bottom Layer w10: J50.14 1435.5,1064.5 1852.5,1064.5 v1(1871,1083)
PA12: J50.16 U50.22 | length 697.8
  Top Layer w10: v1(1901,1083) 1901,1135.25 U50.22
  Bottom Layer w10: J50.16 1360,1040 1859.82,1040 1901,1081.18 v1(1901,1083)
PA13: J50.18 U50.23 | length 720.8
  Top Layer w10: v1(1933,1082) 1933.07,1082.07 U50.23
  Bottom Layer w10: J50.18 1851,1000 v1(1933,1082)
PA14: J50.20 U50.24 | length 793.9
  Top Layer w10: v1(1964.57,1082.43) U50.24
  Bottom Layer w10: J50.20 1782.82,900 1964.57,1081.75 v1(1964.57,1082.43)
PA15: J50.11 U50.25 | length 903.9
  Top Layer w10: v1(1950,1204) 1968,1204 1983.02,1188.98 U50.25
  Bottom Layer w10: J50.11 1248.52,1348.52 1546.48,1348.52 1691,1204 v1(1950,1204)
PB0: J50.10 U50.14 | length 574.3
  Top Layer w10: U50.14 v1(1751.97,1251.97)
  Bottom Layer w10: J50.10 1525,1400 1673.03,1251.97 v1(1751.97,1251.97)
PB1: J50.12 U50.15 | length 451.7
  Top Layer w10: v1(1635,1221) 1635.53,1220.47 U50.15
  Bottom Layer w10: J50.12 1333.52,1333.52 1522.48,1333.52 v1(1635,1221)
PB3: J50.9 U50.26 | length 924.8
  Top Layer w10: v1(1949,1234) 1956.5,1226.5 2011.69,1226.5 U50.26
  Bottom Layer w10: J50.9 1239.53,1439.53 1526.41,1439.53 1691.47,1274.47 1776.53,1274.47 1817,1234 v1(1949,1234)
PB4: J50.8 U50.27 | length 820.5
  Top Layer w10: v1(1948,1268) 1964.03,1251.97 U50.27
  Bottom Layer w10: J50.8 1633.18,1500 1865.18,1268 v1(1948,1268)
RF_AMP: C104.1 U102.1 | length 60.6
  Top Layer w11.18: U102.1 cw(c805.91,764.96) 805.91,767.72 C104.1
RF_FILT_N: C106.2 U102.6 | length 86.9
  Top Layer w10: C106.2 ccw(c587.12,817.96) 587.12,814.96 U102.6
RF_FILT_P: C105.2 U102.5 | length 87.3
  Top Layer w10: C105.2 cw(c587.81,861.27) 587.81,864.96 U102.5
RXLED_L: R30.2 U30.11 | length 66.1
  Top Layer w10: U30.11 2670.28,561.02 R30.2
SYS_RESET_L: C20.2 R21.2 U30.9 U50.4 | length 1553.7
  Top Layer w10: U50.4 1870.08,1423.92 1889,1405 v1(1944,1405) ; v1(2120,1027) 2120,1026 2066,1080 2066,1289 2118.48,1289 2123.03,1284.45 R21.2 ; v1(2321,728) 2321,611 2376,556 2607,556 2619.09,568.09 U30.9
  Bottom Layer w10: v1(1944,1405) 1945,1404 1978,1404 v1(2093,1289) ; v1(2120,1027) 2321,826 v1(2321,728)
TXLED_L: R31.2 U30.5 | length 78.5
  Top Layer w10: R31.2 2511.81,707.68 U30.5
USB_N: J10.2 U30.7 | length 761.7
  Top Layer w13.29: v1(2400,652.31) 2405.85,658.16 2556.34,658.16 2558,656.5 U30.7 ; v1(2847,652.31) 2852.85,658.16 2936.35,658.16 2939,655.51 J10.2
  Bottom Layer w13.29: v1(2400,652.31) 2405.85,658.16 2841.15,658.16 v1(2847,652.31)
USB_P: J10.3 U30.6 | length 762.5
  Top Layer w13.29: v1(2400,684.31) 2405.85,678.45 2554.37,678.45 2558,682.09 U30.6 ; v1(2847,684.31) 2852.85,678.45 2936.35,678.45 2939,681.1 J10.3
  Bottom Layer w13.29: v1(2400,684.31) 2405.85,678.45 2841.15,678.45 v1(2847,684.31)
VRF: C102.2 C103.2 C107.2 C108.1 C109.2 C110.2 J100.2 L100.1 U101.1 U103.1 U103.5 | length 403.5
  Top Layer w10: U103.1 448.82,1124.18 v1(450,1125.36) ; U103.5 614.54,1009.84 C109.2 C110.2 v1(600,957) ; C108.1 v1(700.06,1042.94) ; C107.2 700.76,1086.24 v1(700,1087) ; L100.1 913.39,864.39 v1(939,890) ; U101.1 C102.2@964.59,820.42 ; C102.2 v1(966.57,849.43)
pads on no net: J10.4 S20.3 S40.4 S41.4 S42.4 S50.1 S50.3 U30.4 U30.12 U30.14 U30.16

## Polygon pours and split planes (outlines as drawn)
GND on Top Layer "TopGndPour" (solid, remove dead copper, pour order 4): 40,2140 40,40 3120,40 3120,2140 40,2140
GND on Bottom Layer "BtmGndPour" (solid, remove dead copper, pour order 3): 40,2140 40,40 3120,40 3120,2140 40,2140
GND on Ground Plane (split plane): 3129.51,20.1 20.1,20.1 20.1,2164.94 3129.51,2164.94
VRF on Power Plane (split plane): 1094.9,750 1095.29,748.05 1096.4,746.4 1196.4,646.4 1198.05,645.29 1200,644.9 1394.9,644.9 1394.9,555.1 1200,555.1 1198.05,554.71 1196.4,553.6 1097.89,455.1 20.1,455.1 20.1,894.9 200,894.9 201.95,895.29 203.6,896.4 273.6,966.4 274.71,968.05 275.1,970 275.1,1097.89 372.11,1194.9 1094.9,1194.9
5V0 on Power Plane (split plane): 3129.51,455.1 1755.1,455.1 1755.1,544.9 2600,544.9 2601.95,545.29 2603.6,546.4 2752.11,694.9 3129.51,694.9
3V3 on Power Plane (split plane): 3129.51,705.1 2750,705.1 2748.05,704.71 2746.4,703.6 2597.89,555.1 1750,555.1 1748.05,554.71 1746.4,553.6 1745.29,551.95 1744.9,550 1744.9,450 1745.29,448.05 1746.4,446.4 1748.05,445.29 1750,444.9 3129.51,444.9 3129.51,20.1 20.1,20.1 20.1,444.9 1100,444.9 1101.95,445.29 1103.6,446.4 1202.11,544.9 1400,544.9 1401.95,545.29 1403.6,546.4 1404.71,548.05 1405.1,550 1405.1,650 1404.71,651.95 1403.6,653.6 1401.95,654.71 1400,655.1 1202.11,655.1 1105.1,752.11 1105.1,1200 1104.71,1201.95 1103.6,1203.6 1101.95,1204.71 1100,1205.1 370,1205.1 368.05,1204.71 366.4,1203.6 266.4,1103.6 265.29,1101.95 264.9,1100 264.9,972.11 197.89,905.1 20.1,905.1 20.1,2164.94 3129.51,2164.94

## Other copper
Top Layer:
  rectangle net 4V0: 1500,660 1880,950
  rectangle net 3V3: 1940,660 2300,950
  pour cut-out: 1760,1760 1760,1620 2050,1620 2050,1760
  pour cut-out: 1760,1760 1760,1620 2050,1620 2050,1760
Bottom Layer:
  pour cut-out: 1760,1760 1760,1620 2050,1620 2050,1760
Ground Plane (plane layer: these items are gaps in the copper):
  pour cut-out: 1760,1760 1760,1620 2050,1620 2050,1760
  lines w10: 1964,1196 1970,1202
Power Plane (plane layer: these items are gaps in the copper):
  lines w10: 0,450 1100,450 1200,550 1400,550 1400,650 1250,650 1200,650 1100,750 1100,1200 400,1200 370,1200 270,1100 270,970 200,900 10,900 0,900 ; 3149.61,450 1750,450 1750,550 2600,550 2750,700 3149.61,700

## Silkscreen, mask and mechanical layers (free items; w line width, h text height)
Mechanical 1:
  the board outline again, w10

## Text inside footprints (layer, text, board x,y; h text height)
J101: Mechanical 13 "Overhang" at -87.36,790.55 h100 r270